# Altium PCB AUTO_D_SCHEMATICS.PcbDoc
Units mm, origin at the board's own origin, x right, y up, seen from the top; angles counter-clockwise.
Board outline 89.5 x 73 mm, 2 copper layers (Top Layer, Bottom Layer); 38 components, 34 nets, 134 pads, 18 vias.
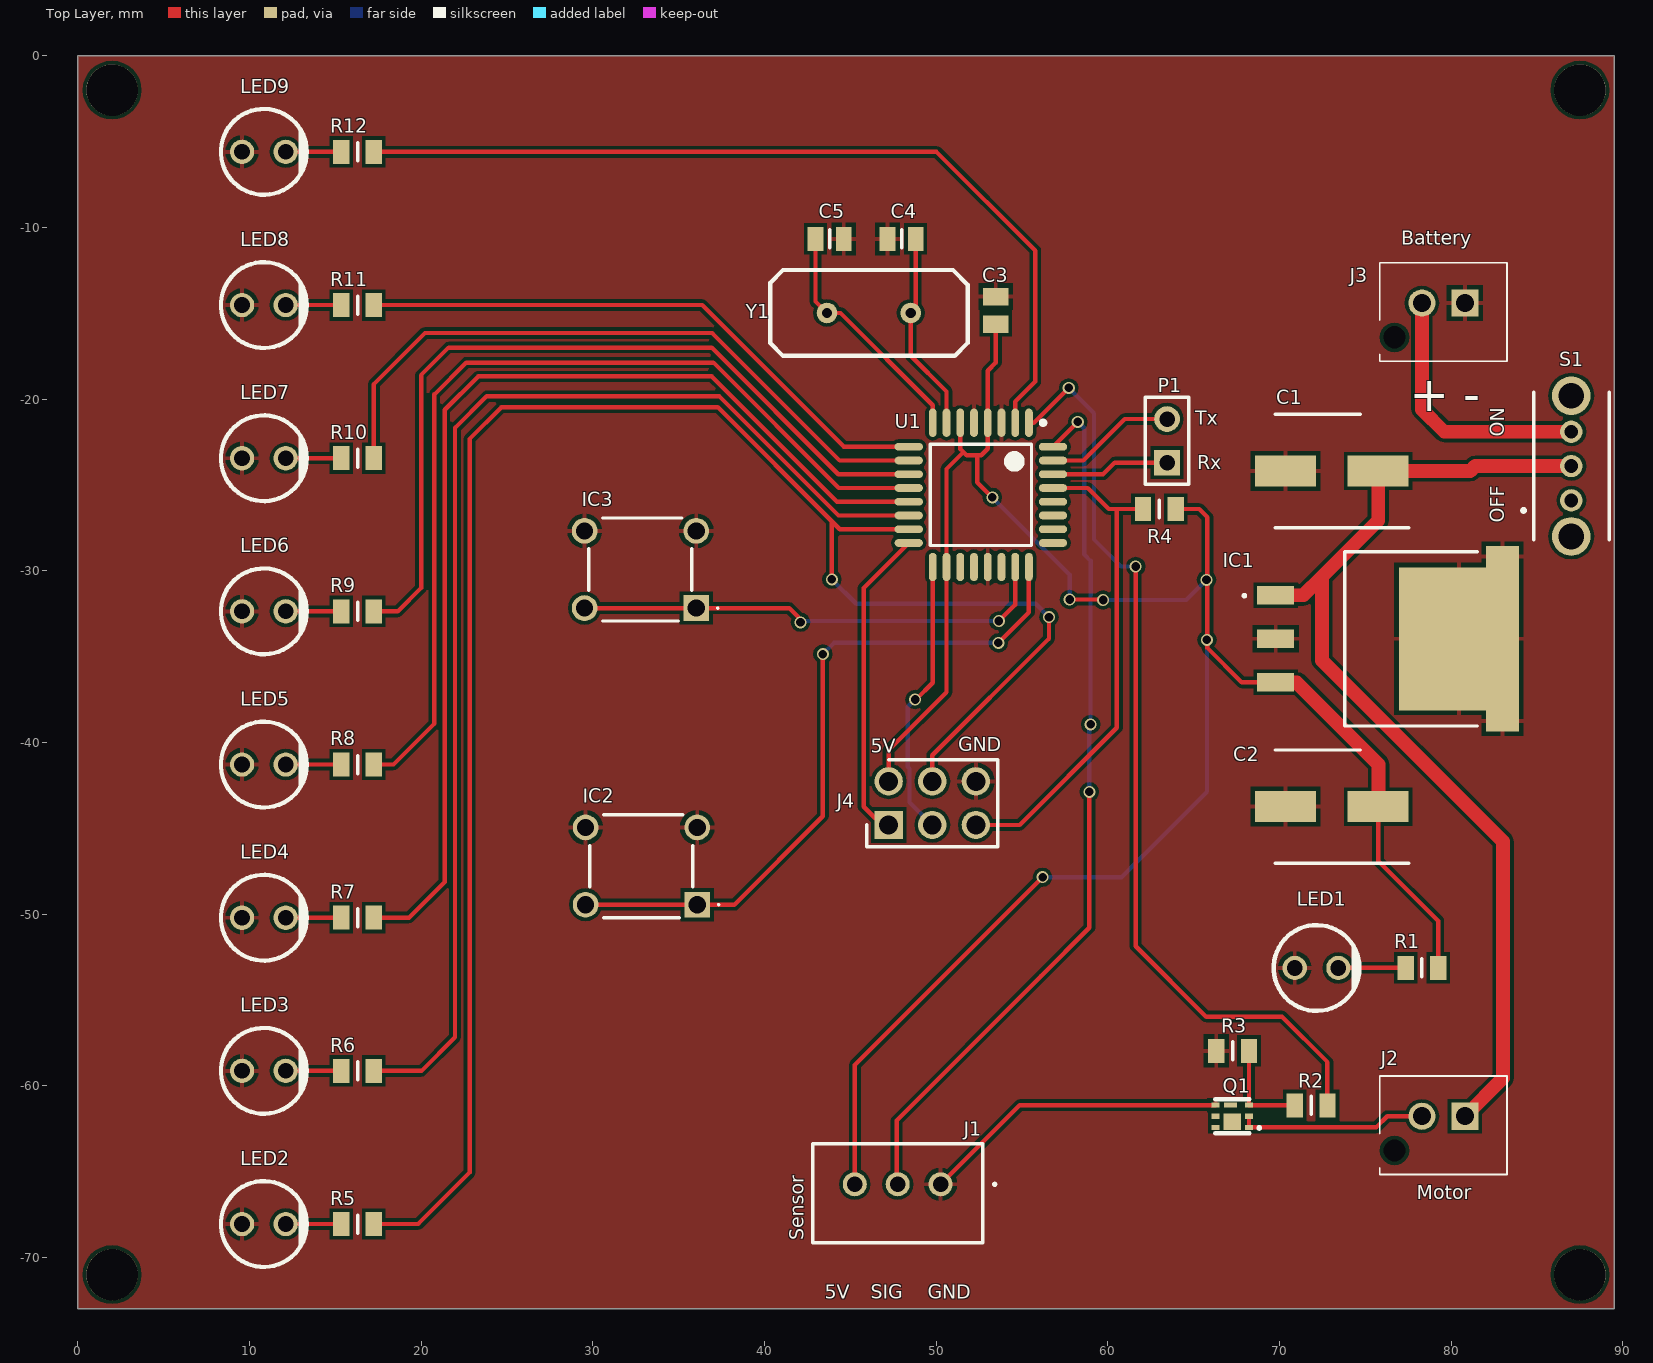
[diagram p0: Top Layer view]
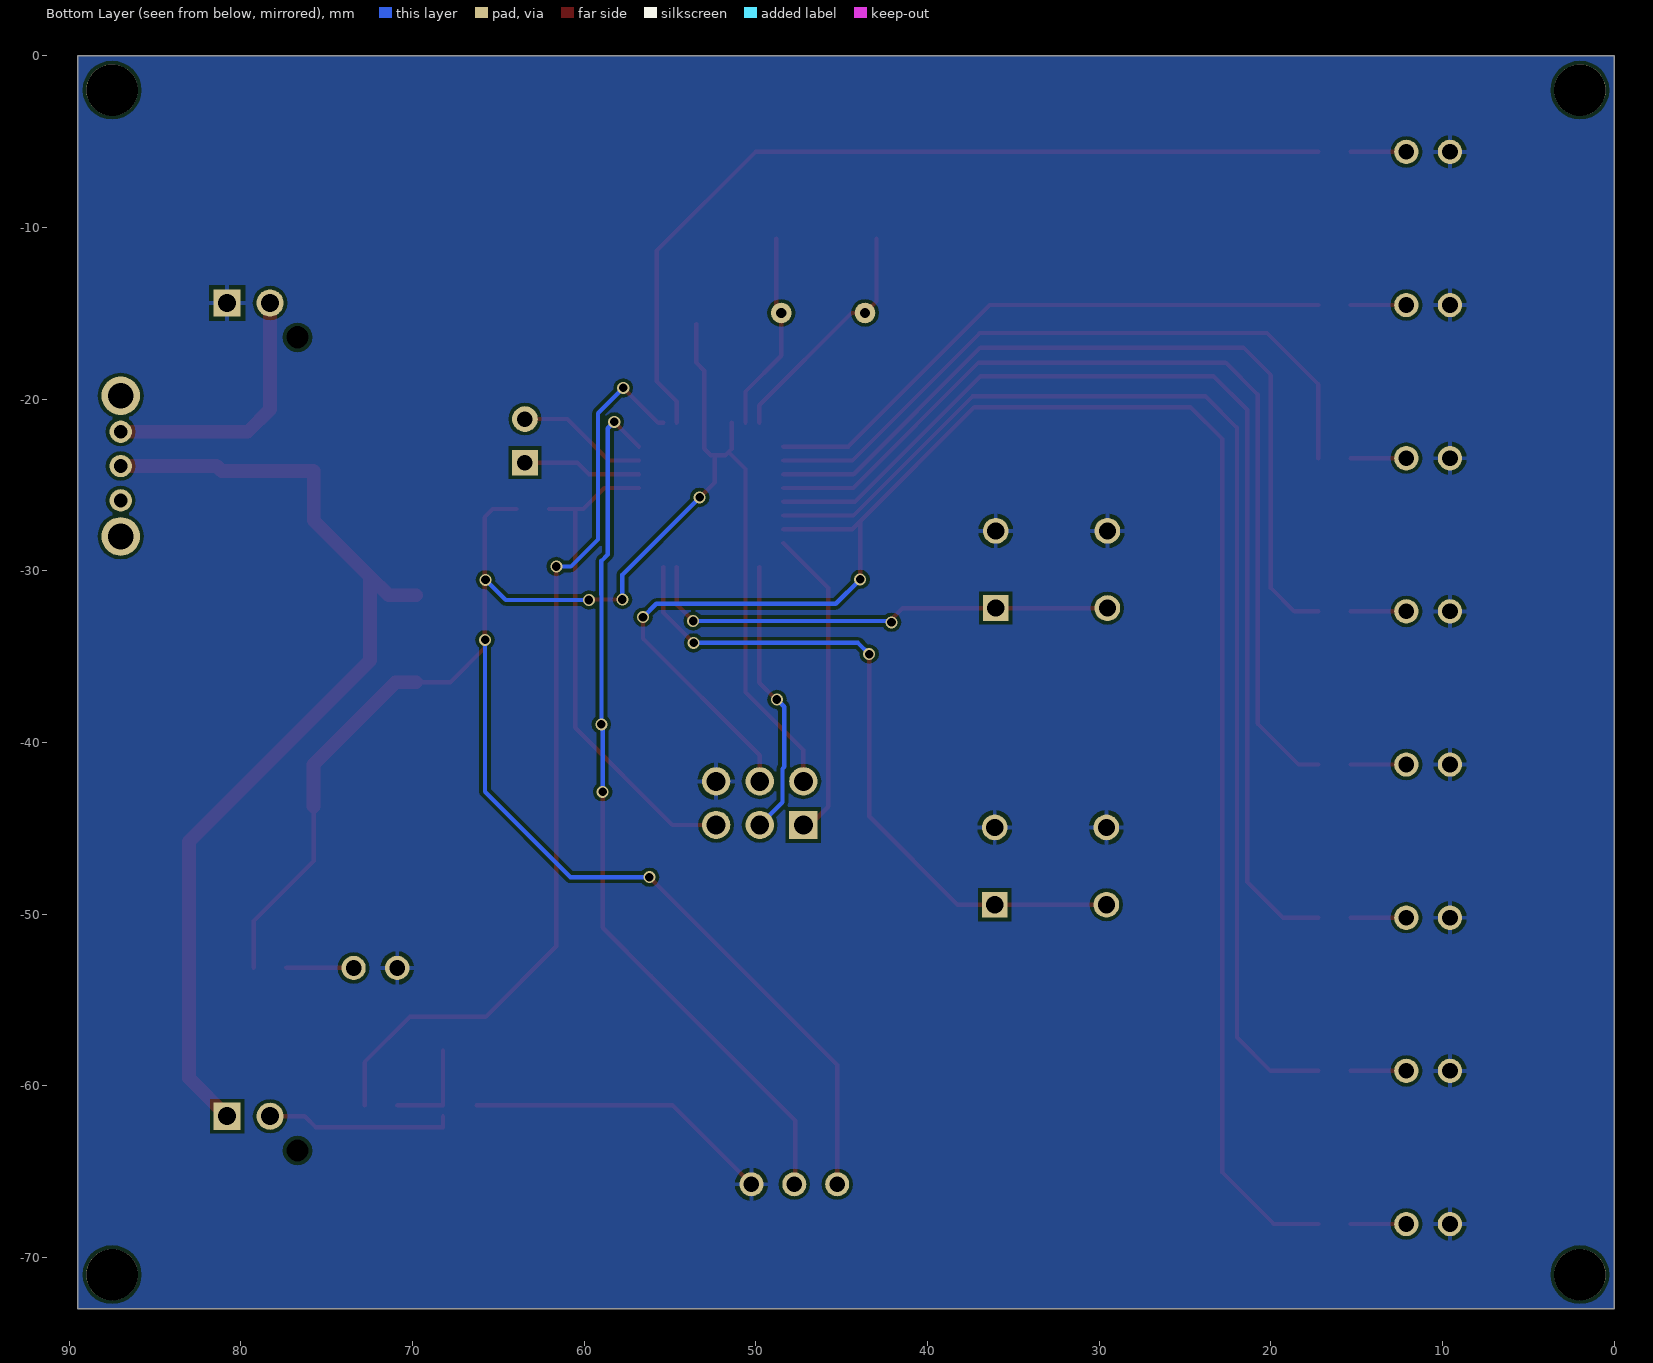
[diagram p1: Bottom Layer view, seen from below]
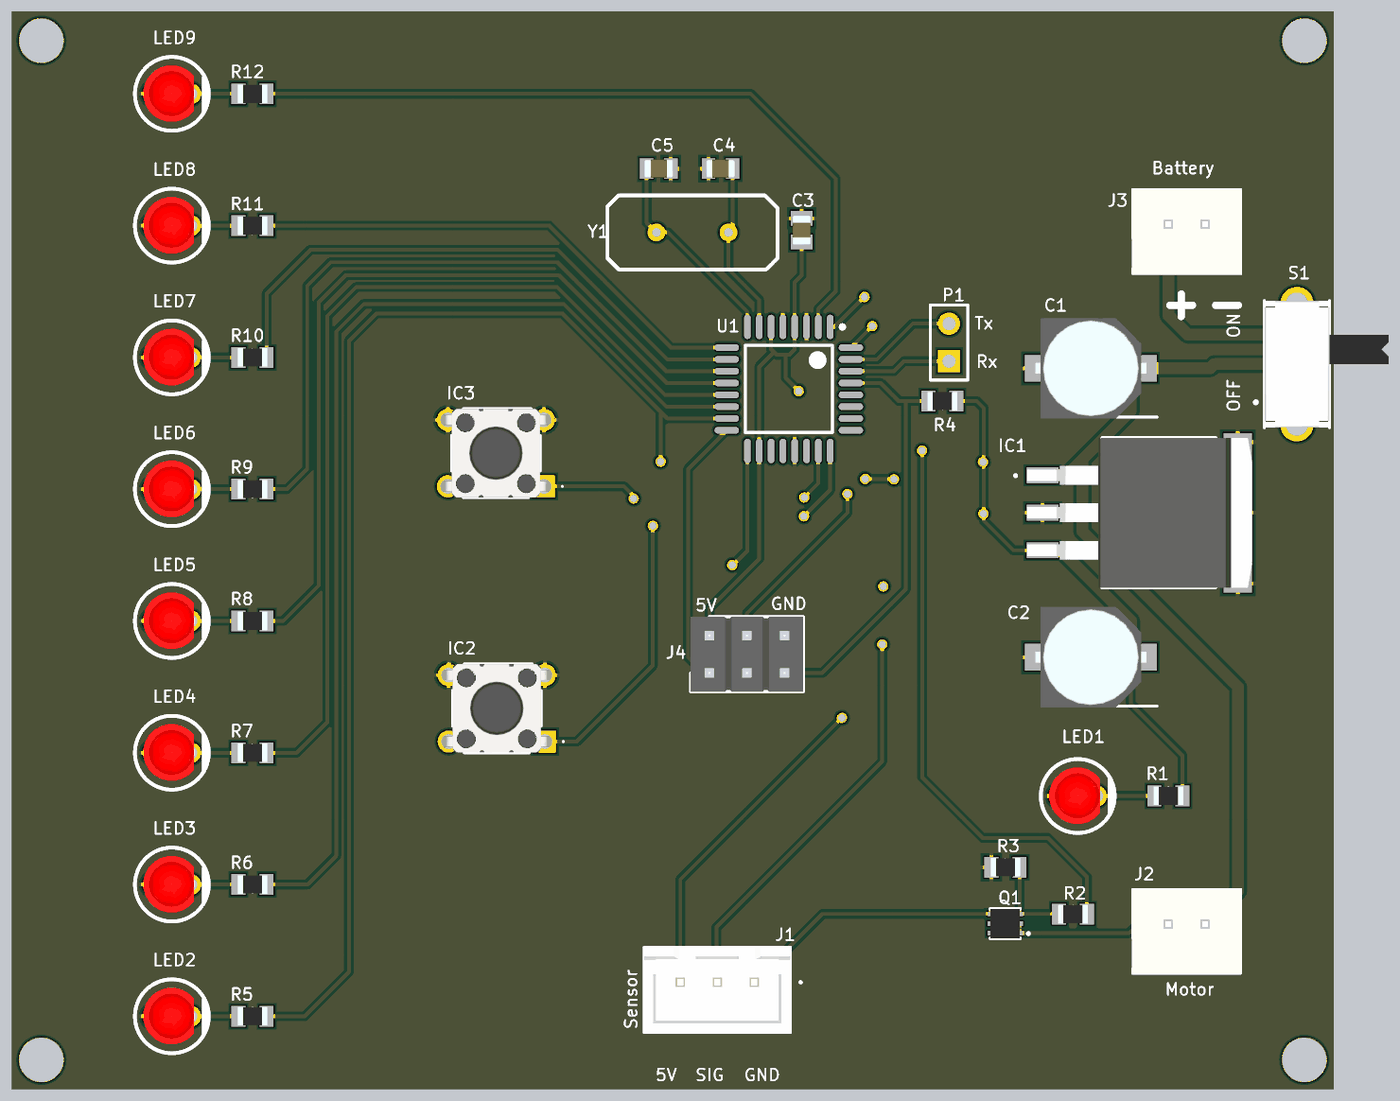
[diagram p2: 3D render of the assembled board from above, using the file's embedded part models]

## Layer stack, top to bottom
Top Solder: solder mask 0.0102, Solder Resist, Dk 3.5
Top Layer: signal copper 0.0356
Dielectric 1: dielectric 0.32, FR-4, Dk 4.8
Bottom Layer: signal copper 0.0356
Bottom Solder: solder mask 0.0102, Solder Resist, Dk 3.5

## Board outline
0,-73 0,0 89.5,0 89.5,-73

## Design rules (kind name [scope] priority, off if disabled: settings)
Clearance [All] p1: gap=0.2 ignorepadtopadclearanceinfootprint=FALSE
PolygonConnect [All] p1: connectstyle=Relief reliefconductorwidth=0.254 reliefentries=4 polygonreliefangle="90 Angle" airgapwidth=0.254
RoutingVias [All] p1: holewidth=0.5 width=0.7 viastyle="Through Hole" minholewidth=0.5 minwidth=0.7 maxholewidth=0.5 maxwidth=0.7
SolderMaskExpansion [All] p1: expansion=0.102 istentingtop=FALSE
Width [All] p1: maxlimit=0.8 minlimit=0.254 preferedwidth=0.254 minimp=50.000000 maximp=50.000000 favimp=50.000000
30 further rules are at their usual default settings.

## Components (designator, comment, footprint, x,y, rotation, side; value= is the part's Value field where it differs from the comment)
C1 "865060345007" CAPAE660X770N 73.052,-24.181 r180 top
C2 "865060345007" CAPAE660X770N 73.052,-43.739 r180 top
C3 "0.1uF" CAPC2012X88N 53.475,-14.825 r270 top
C4 "18pF" CAPC2012X135N 47.987,-10.664 r180 top
C5 "18pF" CAPC2012X135N 43.796,-10.664 r0 top
IC1 "LM7805SX_NOPB" KTT0003B 82.45,-33.96 r180 top
IC2 "TS02-66-43-BK-260-LCR-D" TS026643BK260LCRD 36.084,-49.452 r180 top
IC3 "TS02-66-43-BK-260-LCR-D" TS026643BK260LCRD 36.025,-32.175 r180 top
J1 "B3B-XH-A_LF__SN_" B3BXHALFSN 50.262,-65.738 r180 top
J2 "B2B-XH-AM_LF__SN_" B2BXHAMLFSN 80.799,-61.773 r180 top
J3 "B2B-XH-AM_LF__SN_" B2BXHAMLFSN 80.799,-14.402 r180 top
J4 "M20-9980346" HDRV6W64P254_2X3_762X508X868P 49.775,-43.535 r0 top
LED1 "C5SMF-RJE-CT0W0BB2" C5SMFRJECT0W0BB2 73.433,-53.137 r180 top
LED2 "C5SMF-RJE-CT0W0BB2" C5SMFRJECT0W0BB2 12.109,-68.052 r180 top
LED3 "C5SMF-RJE-CT0W0BB2" C5SMFRJECT0W0BB2 12.109,-59.13 r180 top
LED4 "C5SMF-RJE-CT0W0BB2" C5SMFRJECT0W0BB2 12.109,-50.208 r180 top
LED5 "C5SMF-RJE-CT0W0BB2" C5SMFRJECT0W0BB2 12.109,-41.286 r180 top
LED6 "C5SMF-RJE-CT0W0BB2" C5SMFRJECT0W0BB2 12.109,-32.365 r180 top
LED7 "C5SMF-RJE-CT0W0BB2" C5SMFRJECT0W0BB2 12.109,-23.443 r180 top
LED8 "C5SMF-RJE-CT0W0BB2" C5SMFRJECT0W0BB2 12.109,-14.521 r180 top
LED9 "C5SMF-RJE-CT0W0BB2" C5SMFRJECT0W0BB2 12.109,-5.599 r180 top
P1 "Header 2" HDR1X2 63.45,-23.7 r90 top
Q1 "CSD13202Q2" CSD16301Q2 67.251,-61.773 r180 top
R1 "220R" RESC2012X60N 78.3,-53.125 r0 top
R2 "100R" RESC2012X60N 71.843,-61.138 r180 top
R3 "100K" RESC2012X60N 67.271,-57.963 r0 top
R4 "10K" RESC2012X60N 63,-26.4 r0 top
R5 "220R" RESC2012X60N 16.3,-68.052 r0 top
R6 "220R" RESC2012X60N 16.3,-59.13 r0 top
R7 "220R" RESC2012X60N 16.3,-50.208 r0 top
R8 "220R" RESC2012X60N 16.3,-41.286 r0 top
R9 "220R" RESC2012X60N 16.3,-32.365 r0 top
R10 "220R" RESC2012X60N 16.3,-23.443 r0 top
R11 "220R" RESC2012X60N 16.3,-14.521 r0 top
R12 "220R" RESC2012X60N 16.3,-5.599 r0 top
S1 "OS102011MA1QN1" OS102011MA1QN1 87,-23.9 r90 top
U1 "ATmega328P-AU" "32-TQFP (7x7)mm" 52.605,-25.578 r270 top
Y1 "16Mhz" ABL2-8.000MHZ-D3W-I-T 46.082,-14.982 r0 top

## Footprints (in the part's own frame and the unit in brackets; to place one, negate y for a bottom-side part, rotate by r counter-clockwise, add the part's x,y. Pads: shape width x height; smd on the part's side, far side on the other; paste and mask are expansions set on the pad)
"32-TQFP (7x7)mm" [mm] "Thin QFP, 32-Leads, Body 7x7mm, Pitch 0.8mm, IPC Medium Density"
  oval 1.65x0.45 smd: 1(-4.2,2.8) 2(-4.2,2) 3(-4.2,1.2) 4(-4.2,0.4) 5(-4.2,-0.4) 6(-4.2,-1.2) 7(-4.2,-2) 8(-4.2,-2.8) 17(4.2,-2.8) 18(4.2,-2) 19(4.2,-1.2) 20(4.2,-0.4) 21(4.2,0.4) 22(4.2,1.2) 23(4.2,2) 24(4.2,2.8)
  oval 0.45x1.65 smd: 9(-2.8,-4.2) 10(-2,-4.2) 11(-1.2,-4.2) 12(-0.4,-4.2) 13(0.4,-4.2) 14(1.2,-4.2) 15(2,-4.2) 16(2.8,-4.2) 25(2.8,4.2) 26(2,4.2) 27(1.2,4.2) 28(0.4,4.2) 29(-0.4,4.2) 30(-1.2,4.2) 31(-2,4.2) 32(-2.8,4.2)
  silkscreen extent -4.32,-2.95 2.95,3.75, body extent -3.5,-3.5 3.5,3.5, height 1.2
ABL2-8.000MHZ-D3W-I-T [mm]
  round 1.2 hole 0.6: 1(-2.44,0) 2(2.44,0)
  silkscreen extent -5.75,-2.5 5.75,2.5
B2BXHAMLFSN [mm]
  rect 1.575x1.575 hole 1.05: 1(0,0)
  round 1.575 hole 1.05: 2(2.5,0)
  round 0.65 hole 1.3 unplated: MH1(4.1,2)
  silkscreen extent -2.45,-2.35 4.95,3.4, body extent -2.43,-2.34 4.97,3.41, height 7.01
B3BXHALFSN [mm]
  round 1.4 hole 0.9: 1(0,0) 2(2.5,0) 3(5,0)
  silkscreen extent -3.2,-2.35 7.45,3.4, body extent -2.45,-2.35 7.45,3.4, height 7.09
C5SMFRJECT0W0BB2 [mm]
  round 1.416 hole 0.91: 1(0,0) 2(2.54,0)
  silkscreen extent -1.23,-2.5 3.77,2.5, body extent -0.28,-1.94 3.21,1.9, height 23.39
CAPAE660X770N [mm]
  rect 3.55x1.8 smd: 1(-2.7,0) 2(2.7,0)
  silkscreen extent -4.47,-3.3 3.3,3.3, body extent -3.75,-3.4 3.75,3.4, height 7.7
CAPC2012X88N [mm]
  rect 1.02x1.47 smd: 1(-0.8,0) 2(0.8,0)
  body extent -1,-0.63 1,0.63, height 0.88
CAPC2012X135N [mm]
  rect 0.91x1.39 smd: 1(-0.82,0) 2(0.82,0)
  silkscreen extent 0,-0.53 0,0.53, body extent -1,-0.63 1,0.63, height 1.35
CSD16301Q2 [mm]
  rect 0.45x0.3 smd: 1(-0.975,0.65) 2(-0.975,0) 3(-0.975,-0.65) 4(0.975,-0.65) 5(0.975,0) 6(0.975,0.65)
  rect 0.75x0.3 smd: 7(0.095,-0.65)
  rect 1x0.95 smd: 8(0,0.325)
  silkscreen extent -1.61,-1 1,1, body extent -1,-1 1,1, height 0.8
HDR1X2 [mm] "Connector; Header; 2 Position"
  rect 1.5x1.5 hole 0.9: 1(0,0)
  round 1.5 hole 0.9: 2(2.54,0)
  silkscreen extent -1.27,-1.27 3.81,1.27
HDRV6W64P254_2X3_762X508X868P [mm]
  rect 1.65x1.65 hole 1.1: 1(-2.54,-1.27)
  round 1.65 hole 1.1: 2(-2.54,1.27) 3(0,-1.27) 4(0,1.27) 5(2.54,-1.27) 6(2.54,1.27)
  silkscreen extent -3.81,-2.54 3.81,2.54, body extent -3.81,-2.54 3.81,2.54, height 8.68
KTT0003B [mm]
  rect 2.16x1.07 smd: 1(12.67,-2.54) 2(12.67,0) 3(12.67,2.54)
  rect 7x8.33 smd: 4(2,0)
  rect 1.91x1.235 smd: 5(-0.545,4.782) 6(-0.545,-4.782)
  silkscreen extent 0.94,-5.08 14.56,5.08, body extent -1.52,-5.08 13.72,5.08, height 4.54
OS102011MA1QN1 [mm]
  round 1.3 hole 0.8: 1(-2,0) 2(0,0) 3(2,0)
  round 2.25 hole 1.5: 4(-4.1,0) 5(4.1,0)
  silkscreen extent -4.3,-2.2 4.3,2.88, body extent -4.3,-6.22 4.3,2.18, height 4.59
RESC2012X60N [mm]
  rect 0.95x1.4 smd: 1(-0.95,0) 2(0.95,0)
  silkscreen extent 0,-0.53 0,0.53, body extent -1,-0.63 1,0.63, height 0.6
TS026643BK260LCRD [mm]
  rect 1.5x1.5 hole 1: 1(0,0)
  round 1.5 hole 1: 2(6.5,0) 3(0,-4.5) 4(6.5,-4.5)
  silkscreen extent -1.3,-5.25 6.25,0.75, body extent -0.6,-5.25 7.1,0.75, height 4

## Part data
C1 C2: "Capacitor", Manufacturer_Name="Wurth Elektronik", Mouser Part Number=710-865060345007, Datasheet Link=https://componentsearchengine.com/Datasheets/2/865060345007.pdf, Height=7.7mm, Manufacturer_Part_Number=865060345007, Mouser Price/Stock=https://www.mouser.co.uk/ProductDetail/Wurth-Elektronik/865060345007?qs=0KOYDY2FL2%2F8lOgt%2FC4iag%3D%3D
C3: library part C0805C104K9RACAUTO, "Capacitor", Manufacturer_Name=Kemet, Mouser Part Number=80-C0805C104K9RAUTO, Datasheet Link=https://componentsearchengine.com/Datasheets/2/C0805C104K9RACAUTO.pdf, Height=0.88mm, Manufacturer_Part_Number=C0805C104K9RACAUTO, Mouser Price/Stock=https://www.mouser.co.uk/ProductDetail/KEMET/C0805C104K9RACAUTO?qs=ds50AKTGxA84SWre%252BvImOA%3D%3D
C4 C5: library part C0603C180M5HACTU, "Capacitor", Manufacturer_Name=KEMET, Manufacturer_Part_Number=C0603C180M5HACTU
IC1: "Integrated Circuit", Arrow Part Number=LM7805SX/NOPB, Manufacturer_Name="Texas Instruments", Mouser Part Number=595-LM7805SX/NOPB, Arrow Price/Stock=https://www.arrow.com/en/products/lm7805sxnopb/texas-instruments?region=nac, Datasheet Link=http://www.ti.com/lit/gpn/LM7800, Manufacturer_Part_Number=LM7805SX/NOPB, Mouser Price/Stock=https://www.mouser.co.uk/ProductDetail/Texas-Instruments/LM7805SX-NOPB?qs=gO6GG99qvRB7s5bGtFssmw%3D%3D
IC2 IC3: "Integrated Circuit", Manufacturer_Name="CUI Inc.", Mouser Part Number=179-TS026643BK260LCR, Arrow Part Number=TS02-66-43-BK-260-LCR-D, Arrow Price/Stock=https://www.arrow.com/en/products/ts02-66-43-bk-260-lcr-d/cui-devices?region=nac, Datasheet Link=https://www.cuidevices.com/product/resource/ts02.pdf, Height=4.5mm, Manufacturer_Part_Number=TS02-66-43-BK-260-LCR-D, Mouser Price/Stock=https://www.mouser.co.uk/ProductDetail/CUI-Devices/TS02-66-43-BK-260-LCR-D?qs=A6eO%252BMLsxmQi%252BNuzcShOvg%3D%3D
J1: "Connector", Arrow Part Number=B3B-XH-A(LF)(SN), Manufacturer_Name="JST (JAPAN SOLDERLESS TERMINALS)", Arrow Price/Stock=https://www.arrow.com/en/products/b3b-xh-a-lf-sn/jst-manufacturing, Datasheet Link=https://datasheet.lcsc.com/szlcsc/1812131720_JST-Sales-America-B3B-XH-A-LF-SN_C144394.pdf, Height=7mm, Manufacturer_Part_Number=B3B-XH-A(LF)(SN)
J2 J3: "Connector", Arrow Part Number=B2B-XH-AM(LF)(SN), Manufacturer_Name="JST (JAPAN SOLDERLESS TERMINALS)", Arrow Price/Stock=https://www.arrow.com/en/products/b2b-xh-am-lf-sn/jst-manufacturing, Datasheet Link=https://www.jst-mfg.com/product/pdf/eng/eXH.pdf, Height=7mm, Manufacturer_Part_Number=B2B-XH-AM(LF)(SN)
J4: "Connector", Manufacturer_Name=Harwin, Mouser Part Number=855-M20-9980346, Datasheet Link=https://cdn.harwin.com/pdfs/M20-998.pdf?utm_source=3D_PDF&utm_medium=3D_PDF&utm_campaign=3D_PDF, Height=8.68mm, Manufacturer_Part_Number=M20-9980346, Mouser Price/Stock=https://www.mouser.co.uk/ProductDetail/Harwin/M20-9980346/?qs=%252Bk6%2F5FB6qrmHk2P20oz3FA%3D%3D
LED1 LED2 LED3 LED4 LED5 LED6 LED7 LED8 LED9: "LED", Manufacturer_Name=Wolfspeed, Mouser Part Number=941-C5SMFRJECT0W0BB2, Arrow Part Number=C5SMF-RJE-CT0W0BB2, Arrow Price/Stock=https://www.arrow.com/en/products/c5smf-rje-ct0w0bb2/cree?region=nac, Datasheet Link=https://www.mouser.com/datasheet/2/723/C5SMF_RJF_RJE_GJF_GJE_BJF_BJE_1240-2256911.pdf, Height=8.75mm, Manufacturer_Part_Number=C5SMF-RJE-CT0W0BB2, Mouser Price/Stock=https://www.mouser.co.uk/ProductDetail/Cree-LED/C5SMF-RJE-CT0W0BB2?qs=1sbE9T7hb3bz%2FXMFB8lsHw%3D%3D
P1: "Header, 2-Pin", LatestRevisionDate=17-Jul-2002, LatestRevisionNote="Re-released for DXP Platform.", Publisher="Altium Limited"
Q1: "MOSFET (N-Channel)", Manufacturer_Name="Texas Instruments", Mouser Part Number=595-CSD13202Q2, Arrow Part Number=CSD13202Q2, Arrow Price/Stock=https://www.arrow.com/en/products/csd13202q2/texas-instruments, Datasheet Link=http://www.ti.com/lit/gpn/csd13202q2, Manufacturer_Part_Number=CSD13202Q2, Mouser Price/Stock=https://www.mouser.co.uk/ProductDetail/Texas-Instruments/CSD13202Q2?qs=igp4D3uu33Lqy8Xk%2F8NHvg%3D%3D
R1 R5 R6 R7 R8 R9 R10 R11 R12: library part RC0805FR-07220RL, "Resistor", Manufacturer_Name="YAGEO (PHYCOMP)", Manufacturer_Part_Number=RC0805FR-07220RL
R2: library part RC0805FR-07100RL, "Resistor", Manufacturer_Name="YAGEO (PHYCOMP)", Manufacturer_Part_Number=RC0805FR-07100RL
R3: library part RC0805FR-07100KL, "Resistor", Manufacturer_Name="YAGEO (PHYCOMP)", Manufacturer_Part_Number=RC0805FR-07100KL
R4: library part CRCW080510K0FKEAC, "Resistor", Manufacturer_Name=Vishay, Mouser Part Number=71-CRCW080510K0FKEAC, Arrow Part Number=CRCW080510K0FKEAC, Arrow Price/Stock=https://www.arrow.com/en/products/crcw080510k0fkeac/vishay?region=nac, Datasheet Link=https://mouser.componentsearchengine.com/Datasheets/1/CRCW080510K0FKEAC.pdf, Height=0.6mm, Manufacturer_Part_Number=CRCW080510K0FKEAC, Mouser Price/Stock=https://www.mouser.co.uk/ProductDetail/Vishay-Dale/CRCW080510K0FKEAC?qs=E3Y5ESvWgWORadmUijPtxQ%3D%3D
S1: "Switch", Manufacturer_Name="C & K COMPONENTS", Mouser Part Number=611-OS102011MA1QN1, Arrow Part Number=OS102011MA1QN1, Arrow Price/Stock=https://www.arrow.com/en/products/os102011ma1qn1/ck?region=europe, Datasheet Link=http://www.ckswitches.com/media/1428/os.pdf, Manufacturer_Part_Number=OS102011MA1QN1, Mouser Price/Stock=https://www.mouser.co.uk/ProductDetail/CK/OS102011MA1QN1?qs=WtljUlYws5R6MUgHcLkz4w%3D%3D
U1: "8-bit Microcontrollers - MCU 32KB In-system Flash 20MHz 1.8V-5.5V", Manufacturer_Name="Microchip Technology / Atmel", Manufacturer_Part_Number=ATMEGA328P-AU
Y1: library part ABL-16.000MHZ-B2, "Crystal or Oscillator", Manufacturer_Name=ABRACON, Manufacturer_Part_Number=ABL-16.000MHZ-B2

## Free pads (board coordinates)
  round 3 hole 3: ""(2,-71) ""(2,-2) ""(87.5,-71) ""(87.5,-2)

## Via types
v1: diameter 0.7, hole 0.5, Top Layer to Bottom Layer, 18 vias

## Nets (pads, with @x,y where several pads share a name; then routed paths per layer and width w, separated by ;. In a path a pad name is that pad's centre, name@x,y a point inside that pad or via, vN(x,y) a via of type N, cw(c..) or ccw(c..) an arc to the next point about the centre after c; other vN are vias at no path point)
5V: C2.1 C3.2 IC1.3 J1.3 J4.2 R1.2 R4.2 U1.4 U1.6 U1.18 | length 129.6
  Top Layer w0.254: J1.3 45.262,-58.788 v1(56.2,-47.85) ; J4.2 47.235,-40.44 50.605,-37.07 U1.18 50.605,-24.07 51.588,-23.088 ; U1.6 51.405,-22.905 51.588,-23.088 ; v1(53.275,-25.725) 52.4,-24.85 52.4,-23.275 ; C3.2 53.475,-17.875 53.005,-18.345 U1.4 53.005,-22.895 52.625,-23.275 52.4,-23.275 ; v1(57.775,-31.675) 59.7,-31.675 v1(59.725,-31.7) ; R4.2 65.325,-26.4 65.8,-26.875 65.8,-34.5 67.8,-36.5 IC1.3 ; C2.1 75.752,-46.902 79.25,-50.4 R1.2 ; 51.588,-23.088 51.775,-23.275 52.4,-23.275
  Top Layer w0.8: IC1.3 71,-36.5 75.775,-41.275 75.775,-43.716 C2.1
  Bottom Layer w0.254: v1(53.275,-25.725) 57.775,-30.225 v1(57.775,-31.675) ; v1(56.2,-47.85) 60.8,-47.85 65.775,-42.875 v1(65.775,-34.025) ; v1(59.725,-31.7) 64.575,-31.7 v1(65.75,-30.525)
BTN01: IC3.1 IC3.2 U1.23 | length 28.1
  Top Layer w0.254: IC3.2 IC3.1 41.45,-32.175 42.1,-32.825 v1(42.1,-33) ; v1(53.65,-32.925) 54.605,-31.97 U1.23
  Bottom Layer w0.254: v1(42.1,-33) 42.175,-32.925 v1(53.65,-32.925)
BTN02: IC2.1 IC2.2 U1.24 | length 41.1
  Top Layer w0.254: IC2.2 IC2.1 38.248,-49.452 43.4,-44.3 v1(43.4,-34.85) ; v1(53.625,-34.2) 55.405,-32.42 U1.24
  Bottom Layer w0.254: v1(43.4,-34.85) 44.05,-34.2 v1(53.625,-34.2)
D1: R12.2 U1.2 | length 51.4
  Top Layer w0.254: R12.2 50.024,-5.599 55.775,-11.35 55.775,-18.975 54.605,-20.145 U1.2
D2: R11.2 U1.9 | length 34.6
  Top Layer w0.254: R11.2 36.371,-14.521 44.628,-22.778 U1.9
D3: R10.2 U1.10 | length 39.8
  Top Layer w0.254: R10.2 17.25,-19.125 20.225,-16.15 36.95,-16.15 44.378,-23.578 U1.10
D4: R9.2 U1.11 | length 47.8
  Top Layer w0.254: R9.2 18.635,-32.365 20,-31 20,-18.6 21.6,-17 36.925,-17 44.303,-24.378 U1.11
D5: R8.2 U1.12 | length 55.1
  Top Layer w0.254: R8.2 18.389,-41.286 20.775,-38.9 20.775,-19.725 22.625,-17.875 37.025,-17.875 44.328,-25.178 U1.12
D6: R7.2 U1.13 | length 63.4
  Top Layer w0.254: R7.2 19.292,-50.208 21.375,-48.125 21.375,-20.625 23.325,-18.675 36.925,-18.675 44.228,-25.978 U1.13
D7: R6.2 U1.14 | length 71.1
  Top Layer w0.254: R6.2 20.02,-59.13 21.975,-57.175 21.975,-21.675 23.825,-19.825 37.357,-19.825 44.31,-26.778 U1.14
GND: C1.2 C2.2 C3.1 C4.2 C5.2 IC1.2 IC1.4 IC1.5 IC1.6 IC2.3 IC2.4 IC3.3 IC3.4 J1.1 J3.1 J4.6 LED1.2 LED2.2 LED3.2 LED4.2 LED5.2 LED6.2 LED7.2 LED8.2 LED9.2 Q1.4 R3.1 U1.3 U1.5 U1.21 | length 18
  Top Layer w0.254: J1.1@50.262,-65.821 J1.1 54.877,-61.123 Q1.4
MISO: J4.1 U1.16 | length 18.4
  Top Layer w0.254: J4.1 46.835,-44.805 45.78,-43.75 45.78,-31.003 U1.16
MOSI/D8: J4.4 R5.2 U1.15 | length 108.2
  Top Layer w0.254: R5.2 19.823,-68.052 22.825,-65.05 22.825,-22.325 24.675,-20.475 37.288,-20.475 43.925,-27.112 ; v1(43.925,-30.5) 43.925,-27.112 ; U1.15 44.391,-27.578 43.925,-27.112 ; J4.4 49.775,-40.75 56.575,-33.95 v1(56.575,-32.7)
  Bottom Layer w0.254: v1(43.925,-30.5) 45.35,-31.925 55.8,-31.925 v1(56.575,-32.7)
NetJ2_2: J2.2 Q1.1 Q1.2 | length 11
  Top Layer w0.254: Q1.2 Q1.1 75.627,-62.423 76.277,-61.773 J2.2
NetLED1_1: LED1.1 R1.1 | length 3.9
  Top Layer w0.254: LED1.1 73.445,-53.125 R1.1
NetLED2_1: LED2.1 R5.1 | length 3.2
  Top Layer w0.254: LED2.1 R5.1
NetLED3_1: LED3.1 R6.1 | length 3.2
  Top Layer w0.254: LED3.1 R6.1
NetLED4_1: LED4.1 R7.1 | length 3.2
  Top Layer w0.254: LED4.1 R7.1
NetLED5_1: LED5.1 R8.1 | length 3.2
  Top Layer w0.254: LED5.1 R8.1
NetLED6_1: LED6.1 R9.1 | length 3.2
  Top Layer w0.254: LED6.1 R9.1
NetLED7_1: LED7.1 R10.1 | length 3.2
  Top Layer w0.254: LED7.1 R10.1
NetLED8_1: LED8.1 R11.1 | length 3.2
  Top Layer w0.254: LED8.1 R11.1
NetLED9_1: LED9.1 R12.1 | length 3.2
  Top Layer w0.254: LED9.1 R12.1
NetQ1_3: Q1.3 R2.2 R3.2 | length 5.8
  Top Layer w0.254: R3.2 68.221,-61.118 Q1.3 70.878,-61.123 R2.2
PWM: R2.1 U1.1 | length 54.3
  Top Layer w0.254: U1.1 55.697,-21.378 v1(57.725,-19.35) ; v1(61.625,-29.75) 61.625,-51.875 65.725,-55.975 70.15,-55.975 72.793,-58.618 R2.1
  Bottom Layer w0.254: v1(57.725,-19.35) 59.2,-20.825 59.2,-28.175 60.775,-29.75 v1(61.625,-29.75)
RESET: J4.5 R4.1 U1.29 | length 29.1
  Top Layer w0.254: J4.5 54.87,-44.805 60.525,-39.15 60.525,-26.4 ; U1.29 58.828,-25.178 60.05,-26.4 60.525,-26.4 ; R4.1 60.525,-26.4
RX: P1.1 U1.30 | length 6.9
  Top Layer w0.254: U1.30 59.722,-24.378 60.4,-23.7 P1.1
SCK: J4.3 U1.17 | length 16.2
  Top Layer w0.254: v1(48.775,-37.5) 48.825,-37.5 49.805,-36.52 U1.17
  Bottom Layer w0.254: v1(48.775,-37.5) 48.35,-37.925 48.35,-41.425 48.45,-41.525 48.45,-43.48 J4.3
SIG: J1.2 U1.32 | length 51.2
  Top Layer w0.254: J1.2@47.7,-65.5 47.7,-62.025 56.125,-53.6 58.925,-50.8 v1(58.925,-42.875) ; U1.32 58.25,-21.333 v1(58.25,-21.325)
  Bottom Layer w0.254: v1(58.25,-21.325) 58.625,-21.7 58.625,-29.05 59,-29.425 59,-31.391 58.994,-31.397 58.994,-38.944 v1(59,-38.95) 58.925,-39.025 v1(58.925,-42.875)
TX: P1.2 U1.31 | length 7.6
  Top Layer w0.254: U1.31 58.572,-23.578 60.99,-21.16 P1.2
VCC: C1.1 IC1.1 J2.1 S1.2 | length 58.7
  Top Layer w0.8: IC1.1 71.405,-31.42 72.475,-30.35 ; J2.1 83.025,-59.547 83.025,-45.775 72.475,-35.225 72.475,-30.35 ; S1.2 81.4,-23.9 81.119,-24.181 C1.1 75.752,-27.073 72.475,-30.35
VCC_SWITCH: J3.2 S1.3 | length 15.4
  Top Layer w0.8: J3.2 78.299,-20.599 79.6,-21.9 S1.3
XTL1: C4.1 U1.7 Y1.2 | length 11.7
  Top Layer w0.254: C4.1 48.807,-14.697 Y1.2 48.522,-17.472 50.605,-19.555 U1.7
XTL2: C5.1 U1.8 Y1.1 | length 14
  Top Layer w0.254: C5.1 42.976,-14.316 Y1.1 44.432,-14.982 49.805,-20.355 U1.8
pads on no net: J2.MH1 J3.MH1 Q1.5 Q1.6 Q1.7 Q1.8 S1.1 S1.4 S1.5 U1.19 U1.20 U1.22 U1.25 U1.26 U1.27 U1.28

## Polygon pours and split planes (outlines as drawn)
GND on Top Layer "Top Layer-No Net" (solid, pour order 0): 0,-73 0,0 89.5,0 89.5,-73
GND on Bottom Layer "Top Layer-No Net1" (solid, pour order 1): 0,-73 0,0 89.5,0 89.5,-73

## Silkscreen, mask and mechanical layers (free items; w line width, h text height)
Top Overlay:
  text "Battery" at 77.1,-11 h0.8
  text "+" at 77.6,-20.7 h2
  text "-" at 80.7,-20.7 h2
  text "Tx" at 65.1,-21.5 h0.8
  text "ON" at 83.1,-22.2 h0.8 r90
  text "Rx" at 65.2,-24.1 h0.8
  text "OFF" at 83.1,-27.2 h0.8 r90
  text "GND" at 51.3,-40.5 h0.8
  text "5V" at 46.2,-40.6 h0.8
  text "Motor" at 78,-66.6 h0.8
  text "Sensor" at 42.3,-69 h0.8 r90
  text "5V" at 43.5,-72.4 h0.8
  text "SIG" at 46.2,-72.4 h0.8
  text "GND" at 49.5,-72.4 h0.8
Mechanical 17:
  the board outline again, w0.254